# Altium PCB PCB12.PcbDoc
Units mil, origin at the board's own origin, x right, y up, seen from the top; angles counter-clockwise.
Board outline 6000 x 4000 mil, 2 copper layers (Top Layer, Bottom Layer); 12 components, 12 nets, 100 pads, 3 vias.
Unrouted connection lines stored in the file: 6.
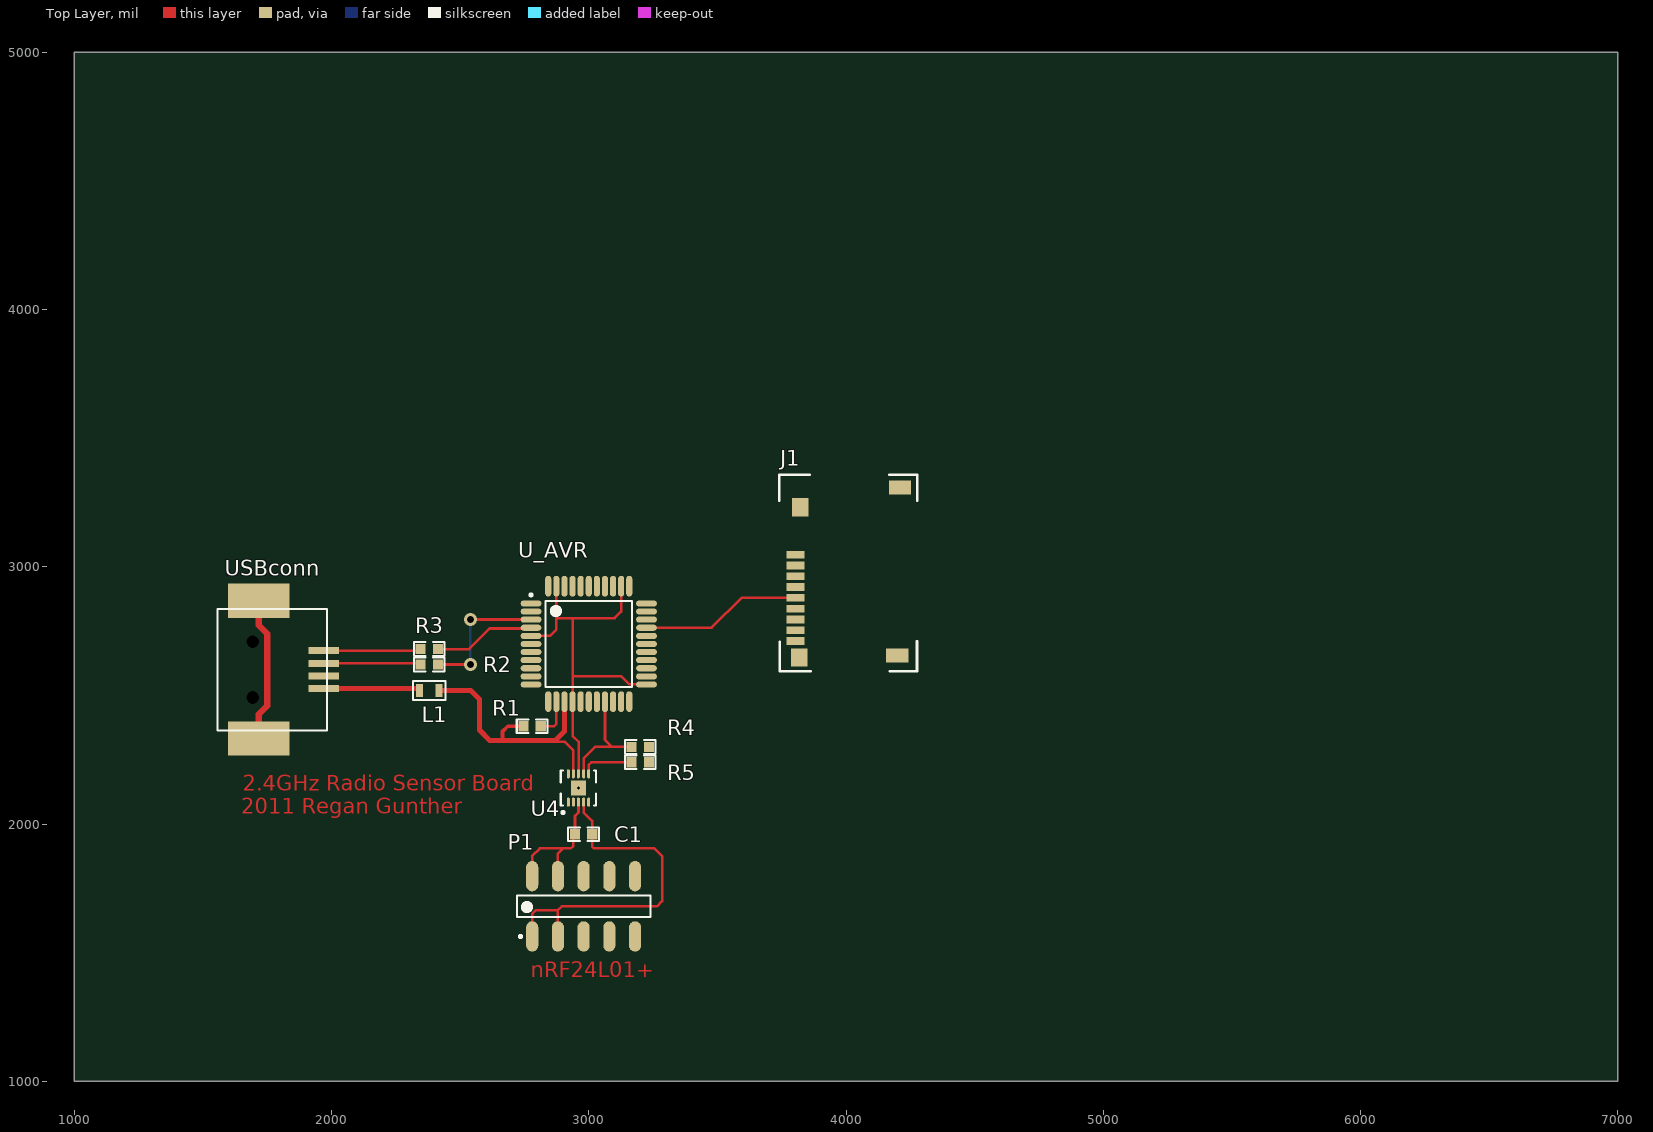
[diagram p0: Top Layer view]
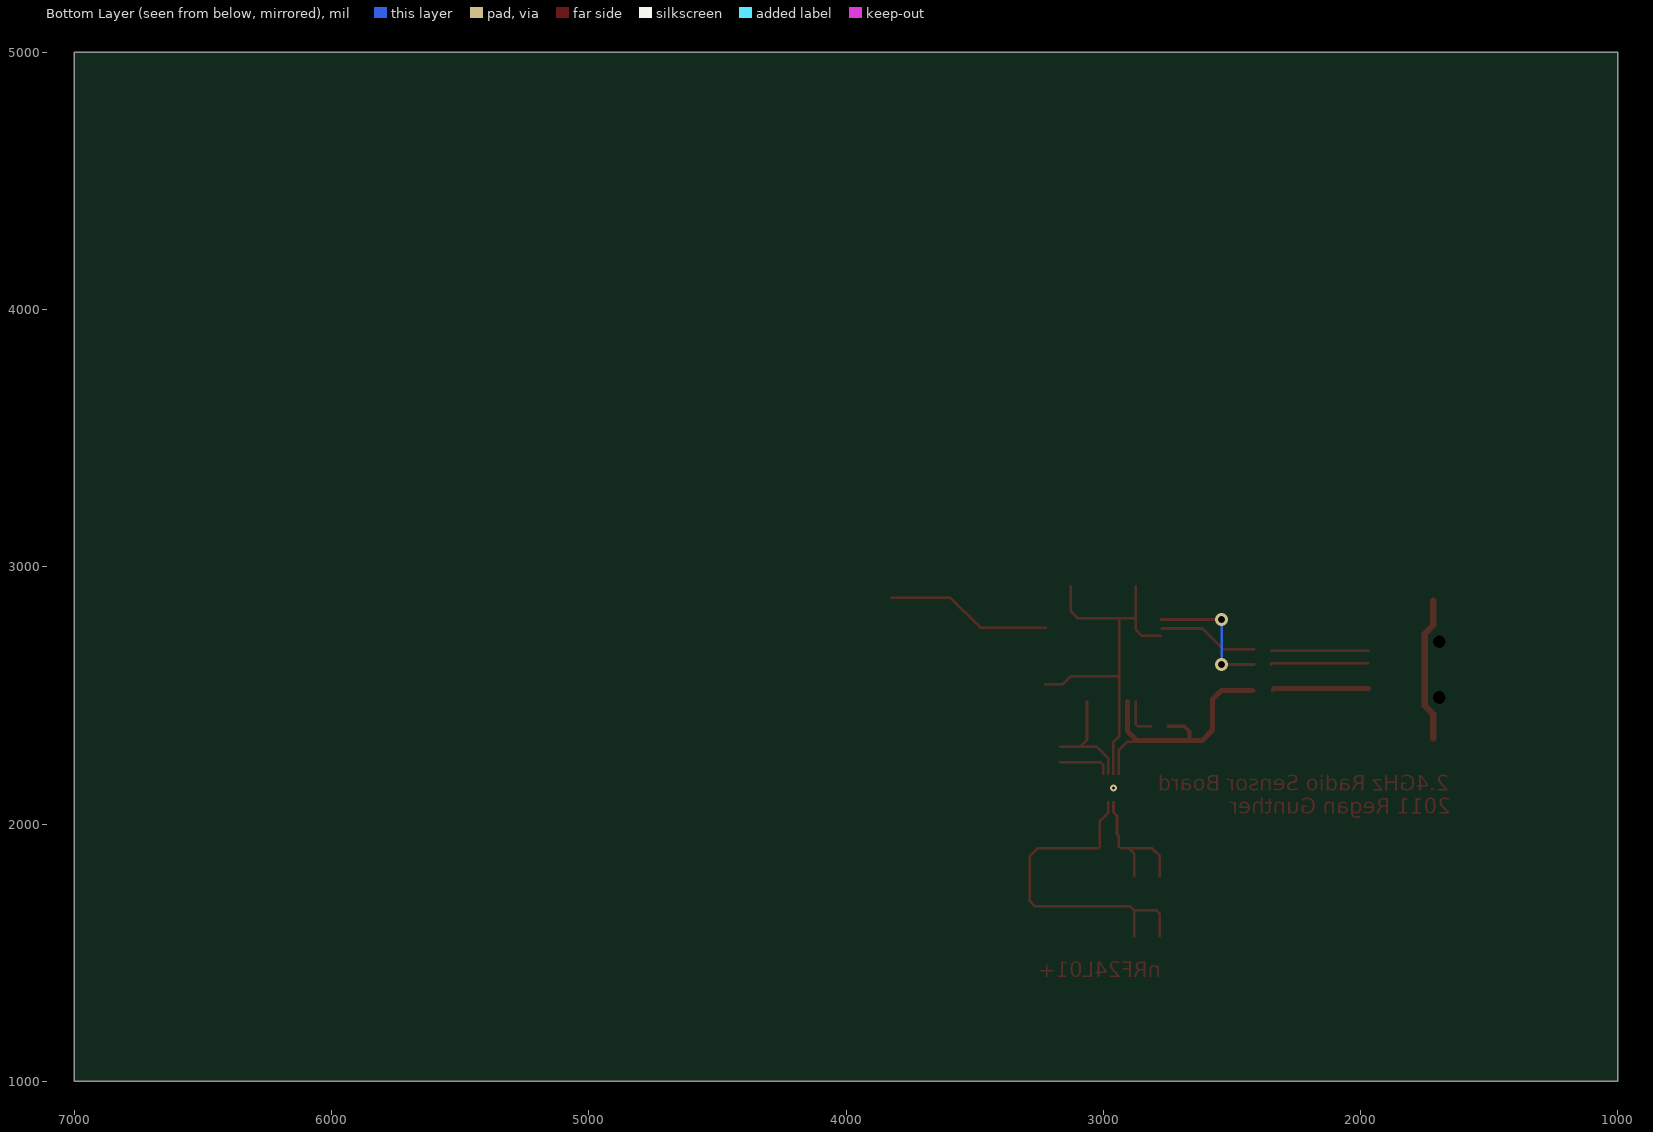
[diagram p1: Bottom Layer view, seen from below]

## Layer stack, top to bottom
Top Layer: signal copper 1.4
Dielectric: dielectric 12.6, FR-4, Dk 4.8
Bottom Layer: signal copper 1.4

## Board outline
1000,1000 7000,1000 7000,5000 1000,5000

## Design rules (kind name [scope] priority, off if disabled: settings)
Clearance [All] p1: gap=5
DiffPairsRouting DiffPair_DiffPairsRouting [InDifferentialPair ('USB')] p1: maxlimit=10 minlimit=10 mostfreqgap=10 maxuncoupledlength=500
DiffPairsRouting [All] p2: maxlimit=10 minlimit=10 mostfreqgap=10 maxuncoupledlength=500
MatchedLengths DiffPair_MatchedLengths [InDifferentialPair ('USB')] p1: tolerance=1000 checknetsindiffpair=TRUE checkdiffpairvsdiffpair=TRUE checkothers=TRUE
PolygonConnect [All] p1: connectstyle=Relief reliefconductorwidth=10 reliefentries=4 polygonreliefangle="90 Angle"
RoomDefinition altium [InComponentClass('altium')] p1: confinementstyle=ConfineIn formatcopy=TRUE lockcomponents=FALSE outline 6855,840 7455,840 7455,1660 6855,1660
RoutingVias [All] p1: holewidth=28 width=50 viastyle="Through Hole" minholewidth=28 minwidth=50 maxholewidth=28 maxwidth=50
SilkscreenOverComponentPads [All] p1: minsilkscreentomaskgap=10
SolderMaskExpansion [All] p1: expansion=4
Width DiffPair_Width [InDifferentialPair('USB')] p1: maxlimit=10 minlimit=10 preferedwidth=10
Width [All] p2: maxlimit=50 minlimit=10 preferedwidth=10
26 further rules are at their usual default settings.

## Classes and differential pairs
differential pair USB: +USB_P -USB_N

## Components (designator, comment, footprint, x,y, rotation, side; value= is the part's Value field where it differs from the comment)
C1 "10nF" 0603 2980,1960 r0 top
J1 "MicroSD_Socket" MicroSD 4040,2980 r0 top
L1 "Ferrite" 0805 2380,2520 r0 top
P1 "RF_HDR" "Header SMD 2x10 Female" 2980,1680 r90 top
R1 "10k" 0603 2780,2380 r180 top
R2 "22R" 0603 2380,2620 r0 top
R3 "22R" 0603 2380,2680 r0 top
R4 "4k7" 0603 3200,2300 r0 top
R5 "4k7" 0603 3200,2240 r0 top
U4 "MMA7660FCR1" DFN-10__MMA7660FCR1 2960,2140 r90 top
U_AVR "ATmega32U4" TQFP-44 3000,2700 r0 top
USBconn "MINI-USB Type B" "USB-B SMD" 1340,2600 r270 top

## Footprints (in the part's own frame and the unit in brackets; to place one, negate y for a bottom-side part, rotate by r counter-clockwise, add the part's x,y. Pads: shape width x height; smd on the part's side, far side on the other; paste and mask are expansions set on the pad)
0603 [mm]
  rect 1x1 smd: 1(-0.85,0) 2(0.85,0)
  silkscreen extent -1.52,-0.69 1.52,0.69
0805 [mm]
  rect 0.7x1.3 smd: 1(-0.95,-0.025) 2(0.95,-0.025)
  silkscreen extent -1.6,-0.95 1.6,0.9
DFN-10__MMA7660FCR1 [mm] "DFN, 10-Leads, Body 3.0x3.0mm (max), Pitch 0.50mm, IPC Medium Density"
  oval 0.9x0.3 smd: 1(-1.4,1) 2(-1.4,0.5) 3(-1.4,0) 4(-1.4,-0.5) 5(-1.4,-1) 6(1.4,-1) 7(1.4,-0.5) 8(1.4,0) 9(1.4,0.5) 10(1.4,1)
  rect 1.5x1.5 smd: 11(0,0)
  silkscreen extent -2.54,-1.75 1.75,1.75, body extent -1.5,-1.5 1.5,1.5, height 1
"Header SMD 2x10 Female" [mm] "SOP, 10-Leads, Body 13.2x5.1mm (max), Pitch 2.54mm, IPC Medium Density"
  oval 3x1.2 smd: 1(-2.975,5.08) 2(-2.975,2.54) 3(-2.975,0) 4(-2.975,-2.54) 5(-2.975,-5.08) 6(2.975,-5.08) 7(2.975,-2.54) 8(2.975,0) 9(2.975,2.54) 10(2.975,5.08)
  silkscreen extent -3.1,-6.6 1.07,6.6, body extent -2.54,-6.6 2.54,6.6, height 5
MicroSD [mil]
  rect 70x30 smd: !CS(-237,25) ?(-237,-269) MISO(-237,-185) MOSI(-237,-17) NC(-237,67) RESVD(-237,-227) SCLK(-237,-101) VDD(-237,-59) VSS(-237,-143)
  rect 63x71 smd: GND(-222,-333) GND(-217.5,251)
  rect 87x55 smd: GND(159,-325.5) GND(170,328.5)
  silkscreen extent -300,-386 237,378
TQFP-44 [mm] "44-Pin Thin Quad Flat Pack 0.8 mm Pitch, IPC Low Density"
  oval 2.05x0.6 smd: 1(-5.7,4) 2(-5.7,3.2) 3(-5.7,2.4) 4(-5.7,1.6) 5(-5.7,0.8) 6(-5.7,0) 7(-5.7,-0.8) 8(-5.7,-1.6) 9(-5.7,-2.4) 10(-5.7,-3.2) 11(-5.7,-4) 23(5.7,-4) 24(5.7,-3.2) 25(5.7,-2.4) 26(5.7,-1.6) 27(5.7,-0.8) 28(5.7,0) 29(5.7,0.8) 30(5.7,1.6) 31(5.7,2.4) 32(5.7,3.2) 33(5.7,4)
  oval 0.6x2.05 smd: 12(-4,-5.7) 13(-3.2,-5.7) 14(-2.4,-5.7) 15(-1.6,-5.7) 16(-0.8,-5.7) 17(0,-5.7) 18(0.8,-5.7) 19(1.6,-5.7) 20(2.4,-5.7) 21(3.2,-5.7) 22(4,-5.7) 34(4,5.7) 35(3.2,5.7) 36(2.4,5.7) 37(1.6,5.7) 38(0.8,5.7) 39(0,5.7) 40(-0.8,5.7) 41(-1.6,5.7) 42(-2.4,5.7) 43(-3.2,5.7) 44(-4,5.7)
  silkscreen extent -5.82,-4.25 4.25,4.97, body extent -5,-5 5,5, height 1.2
"USB-B SMD" [mm]
  round 0 hole 1.25: 0(-2.75,9) 0(2.75,9)
  rect 0.7x3 smd: 1(1.875,16) 2(-0.625,16) 3(-1.875,16) 4(0.625,16)
  rect 3.4x6.04 smd: 5(-6.8,9.58) 6(6.8,9.58)
  silkscreen extent -6,5.5 6,16.3

## Part data
C1: library part "CP_10nF 0603", "CAP CER 10000PF 100V X7R 0603"
L1: library part "IN_FERRITE CHIP 120 OHM 800mA 0805", "FERRITE CHIP 120 OHM 800mA 0805"
P1: library part "Header 5X2", "Header, 5-Pin, Dual row"
R1: library part "RS_10k 0603", "RES 10.0K OHM 1/10W 1% 0603 SMD"
R2 R3: library part "RS_22R 0603", "RES 22 OHM 1/10W 1% 0603 SMD"
R4 R5: library part "RS_4k7 0603", "RES 4.70K OHM 1/10W 1% 0603 SMD"
U_AVR: library part IC_ATmega32U4_44-TQFP, "AVR 8-bit USB microcontroller"
USBconn: library part "JP_MINIUSB type B_1", "MINI-USB Type B Single Connector"

## Via types
v1: diameter 50, hole 28, Top Layer to Bottom Layer, 2 vias
v2: diameter 25.98, hole 12.99, Top Layer to Bottom Layer, tented top, 1 vias

## Nets (pads, with @x,y where several pads share a name; then routed paths per layer and width w, separated by ;. In a path a pad name is that pad's centre, name@x,y a point inside that pad or via, vN(x,y) a via of type N, cw(c..) or ccw(c..) an arc to the next point about the centre after c; other vN are vias at no path point)
GND: C1.2 P1.1 P1.2 U4.4 U4.8 U_AVR.5 U_AVR.15 U_AVR.23 U_AVR.35 U_AVR.43 | length 2914.1
  Top Layer w10: U_AVR.5 2848.5,2731.5 2874.02,2757.01 2874.02,2800 ; P1.1 2780,1650 2795,1665 2880,1665 ; U_AVR.43 2874.02,2800 ; P1.2 2880,1665 ; 2937.01,2797.01 2937.01,2575 ; U4.8 2960.32,2195.43 2960.32,2319.68 2937.01,2342.99 U_AVR.15 2937.01,2575 ; U4.4 2979.68,2045.32 3013.46,2011.54 C1.2 3013.46,1911.54 3020,1905 3255,1905 3285,1875 3285,1700 3265,1680 2895,1680 2880,1665 ; U_AVR.35 3125.98,2825.98 3100,2800 2874.02,2800 ; U_AVR.23 3157.48,2542.52 3125,2575 2937.01,2575
NetJ1_SCLK: J1.SCLK U_AVR.30 | length 646.6
  Top Layer w10: U_AVR.30 3477.99,2762.99 3594,2879 J1.SCLK@3823,2879
NetL1_1: L1.1 USBconn.1 | length 375.6
  Top Layer w10: L1.1@2335.43,2526.18 L1.1
  Top Layer w20: USBconn.1 L1.1@2335.43,2526.18
NetR1_1: R1.1 U_AVR.13 | length 150.9
  Top Layer w10: R1.1 2865,2380 2874.02,2389.02 U_AVR.13
NetR2_2: R2.2 U_AVR.3 | length 536.6
  Top Layer w10: R2.2 v1(2540,2620) ; v1(2540,2795) U_AVR.3@2775.08,2795
  Bottom Layer w10: v1(2540,2620) v1(2540,2795)
NetR3_2: R3.2 U_AVR.4 | length 392.3
  Top Layer w10: R3.2 2535,2680 2615,2760 U_AVR.4@2772.6,2760
NetR4_1: R4.1 U4.7 U_AVR.19 | length 452
  Top Layer w10: U4.7 2979.69,2254.69 3025,2300 3090,2300 ; U_AVR.19 3062.99,2327.01 3090,2300 ; R4.1 3090,2300
NetR5_1: R5.1 U4.6 U_AVR.18 | length 205.8
  Top Layer w10: U4.6 2999.37,2229.37 3010,2240 R5.1
NetUSBconn_5: USBconn.5 USBconn.6 | length 562.6
  Top Layer w25: USBconn.6 1717.16,2427.16 1750,2460 1750,2740 1717.16,2772.84 USBconn.5
USB_N: R2.1 USBconn.2 | length 381.2
  Top Layer w10: USBconn.2 2346.54,2624.61 R2.1
USB_P: R3.1 USBconn.3 | length 376.6
  Top Layer w10: USBconn.3 R3.1@2346.54,2673.82
VCC: C1.1 L1.2 P1.9 P1.10 R1.2 R4.2 R5.2 U4.3 U4.9 U_AVR.14 U_AVR.34 | length 1613.9
  Top Layer w10: P1.10 2780,1875 2810,1905 2900,1905 ; 2870,2325 2875,2320 2905.32,2320 2940.32,2285 U4.9 ; P1.9 2880,1885 2900,1905 ; U4.3 2960,2045 2946.54,2031.54 C1.1 2940,1953.46 2940,1915 2930,1905 2900,1905
  Top Layer w15: 2665,2330 2665,2360 2685,2380 R1.2
  Top Layer w20: L1.2 2540.98,2519.02 2575,2485 2575,2365 2615,2325 2870,2325 2905.51,2360.51 U_AVR.14
pads on no net: J1.!CS J1.? J1.GND J1.MISO J1.MOSI J1.NC J1.RESVD J1.VDD J1.VSS P1.3 P1.4 P1.5 P1.6 P1.7 P1.8 U4.1 U4.2 U4.5 U4.10 U4.11 U_AVR.1 U_AVR.2 U_AVR.6 U_AVR.7 U_AVR.8 U_AVR.9 U_AVR.10 U_AVR.11 U_AVR.12 U_AVR.16 U_AVR.17 U_AVR.20 U_AVR.21 U_AVR.22 U_AVR.24 U_AVR.25 U_AVR.26 U_AVR.27 U_AVR.28 U_AVR.29 U_AVR.31 U_AVR.32 U_AVR.33 U_AVR.36 U_AVR.37 U_AVR.38 U_AVR.39 U_AVR.40 U_AVR.41 U_AVR.42 U_AVR.44 USBconn.0 USBconn.4
copper on no net:
  other v2: 2960,2140

## Other copper
Top Layer:
  text "2.4GHz Radio Sensor Board" at 1655,2130 h60
  text "2011 Regan Gunther" at 1650,2040 h60
  text "nRF24L01+" at 2775,1405 h60